# EAGLE board Generador de Funciones (EAGLE 9.0.1)
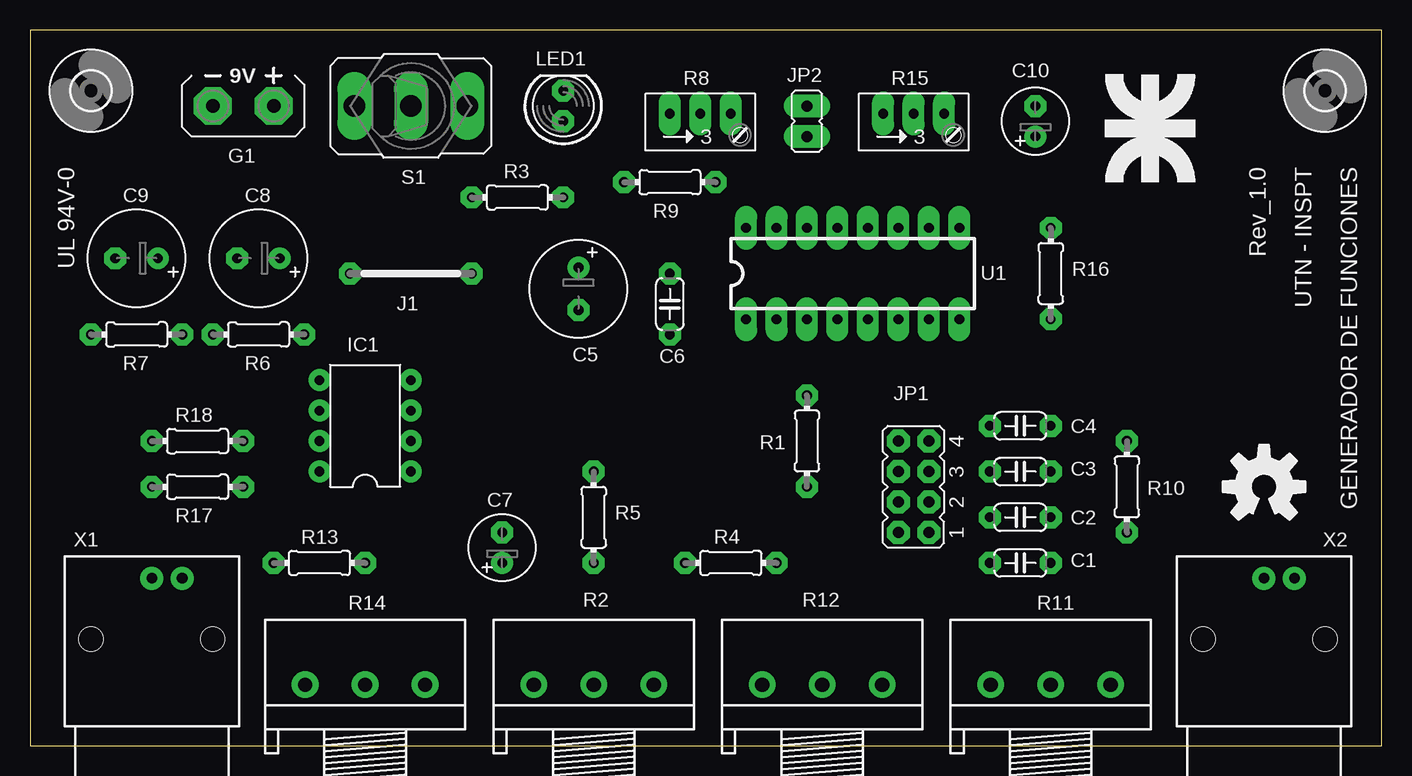
[diagram p0: board, top side]
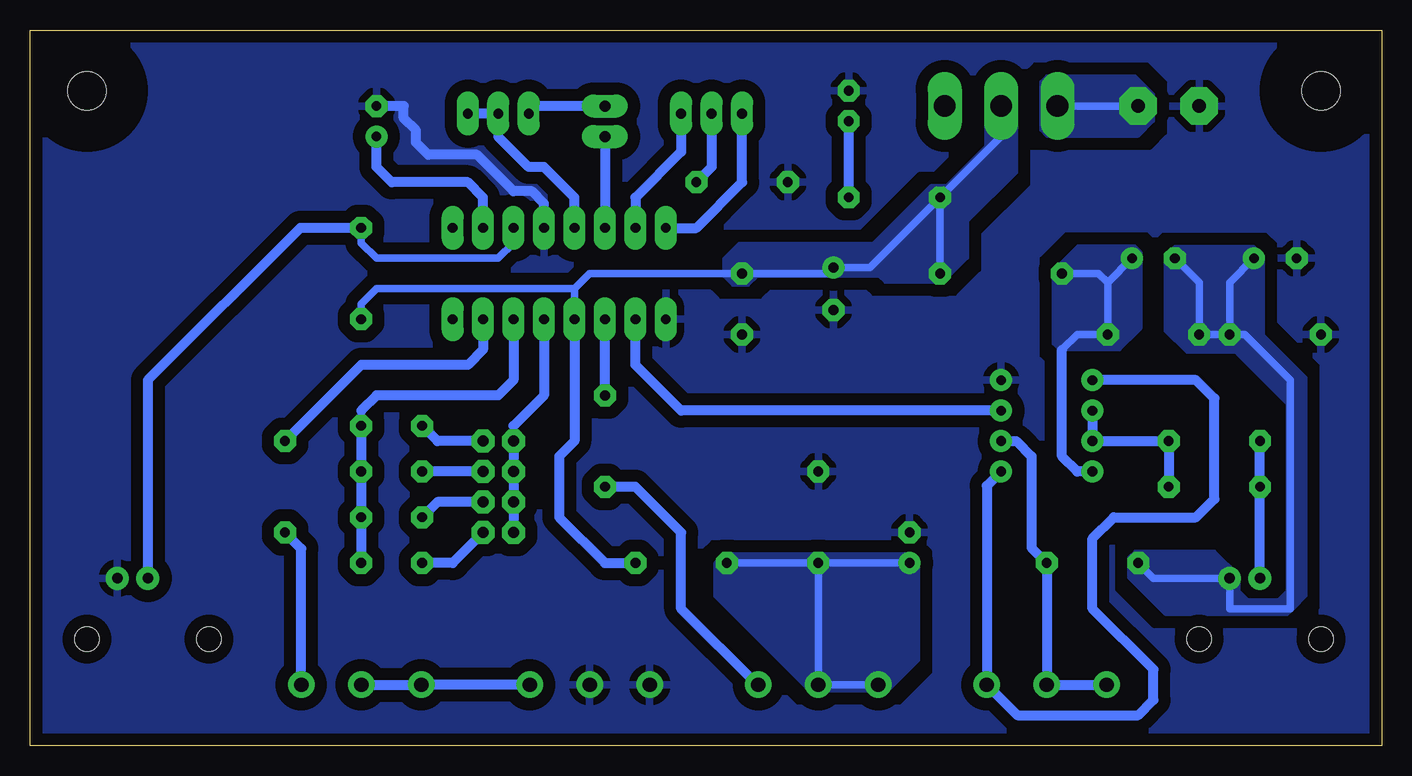
[diagram p1: board, bottom side, seen from below]

Size 112.7 x 59.68 mm. Coordinates in mm from the lower left corner, seen from the top.
Outline: 0,0 112.7,0 112.7,59.68 0,59.68 0,0
Copper layers (1*16): Top 0.035mm / dielectric 1.5mm / Bottom 0.035mm
Design rules "default *": minimum track width 24mil, minimum drill 0.35mm, track to track 6mil, track to pad 6mil, pad to pad 6mil, via to via 6mil, smd to smd 6mil, copper to edge 40mil, drill to drill 24mil, minimum pad ring 20mil, minimum via ring 20mil, stop-mask expansion 4mil, vias tented up to drill 0mil, thermal gap 24mil

## Footprints (pad centres in the part's own frame; a part is rotated, then mirrored left to right if it is on the bottom)
C050-024X044 = drill 0.813 octagon: 1 -2.54,0; 2 2.54,0
E3,5-8 = drill 0.813 pad 1.6: + -1.778,0 | drill 0.813 pad 1.6 octagon: - 1.778,0
E2,5-6 = drill 0.813 pad 1.6: + -1.27,0 | drill 0.813 pad 1.6 octagon: - 1.27,0
AB9V = drill 1.118 pad 3.15 octagon: + 0,2.54; - 0,-2.54
DIL08 = drill 0.813 pad 1.27: 1 -3.81,-3.81; 2 -1.27,-3.81; 3 1.27,-3.81; 4 3.81,-3.81; 5 3.81,3.81; 6 1.27,3.81; 7 -1.27,3.81; 8 -3.81,3.81
10 = drill 0.813 pad 1.6 octagon: 1 -5.08,0; 2 5.08,0
JP4Q = drill 0.914 octagon: 1 -3.81,-1.27; 2 -3.81,1.27; 3 -1.27,-1.27; 4 -1.27,1.27; 5 1.27,-1.27; 6 1.27,1.27; 7 3.81,-1.27; 8 3.81,1.27
JP1 = drill 0.914 long: 1 0,-1.27; 2 0,1.27
LED5MM = drill 0.813 octagon: A -1.27,0; K 1.27,0
0204/7 = drill 0.813 octagon: 1 -3.81,0; 2 3.81,0
3RP/1610N = drill 1.2 pad 2.184: 1 -5,0; 2 0,0; 3 5,0
RJ9W = drill 0.813 long: A 2.54,0.635; E -2.54,0.635; S 0,0.635
M9040P = drill 1.803 long: 1 0,4.699; 2 0,0; 3 0,-4.699
DIL16 = drill 0.813 long: 1 -8.89,-3.81; 2 -6.35,-3.81; 3 -3.81,-3.81; 4 -1.27,-3.81; 5 1.27,-3.81; 6 3.81,-3.81; 7 6.35,-3.81; 8 8.89,-3.81; 9 8.89,3.81; 10 6.35,3.81; 11 3.81,3.81; 12 1.27,3.81; 13 -1.27,3.81; 14 -3.81,3.81; 15 -6.35,3.81; 16 -8.89,3.81
3,2 = hole 3.2: 0,0
AMP_227161 = drill 0.9 pad 1.27: 1 0,-5.08; 2 -2.54,-5.08 | hole 2: -5.08,0; 5.08,0

## Placement (x,y rotation side)
C1  1u  [C050-024X044]  82.55,15.24 0 top
C2  100n  [C050-024X044]  82.55,19.05 0 top
C3  10n  [C050-024X044]  82.55,22.86 0 top
C4  1n  [C050-024X044]  82.55,26.67 0 top
C5  470u  [E3,5-8]  45.72,38.1 270 top
C6  100n  [C050-024X044]  53.34,36.83 270 top
C7  10u  [E2,5-6]  39.37,16.51 90 top
C8  220u  [E3,5-8]  19.05,40.64 180 top
C9  220u  [E3,5-8]  8.89,40.64 180 top
C10  1u  [E2,5-6]  83.82,52.07 90 top
G1  AB9V  [AB9V]  17.78,53.34 270 top
IC1  NE5532N  [DIL08]  27.94,26.67 90 top
J1  J10MM  [10]  31.75,39.37 180 top
JP1  [JP4Q]  73.66,21.59 90 top
JP2  [JP1]  64.77,52.07 180 top
LED1  [LED5MM]  44.45,53.34 90 top
R1  10R  [0204/7]  64.77,25.4 90 top
R2  10k  [3RP/1610N]  46.99,5.08 0 top
R3  1k  [0204/7]  40.64,45.72 0 top
R4  10k  [0204/7]  58.42,15.24 0 top
R5  10k  [0204/7]  46.99,19.05 270 top
R6  1k  [0204/7]  19.05,34.29 180 top
R7  1k  [0204/7]  8.89,34.29 180 top
R8  25k  [RJ9W]  55.88,52.07 0 top
R9  1k  [0204/7]  53.34,46.99 180 top
R10  3k3  [0204/7]  91.44,21.59 90 top
R11  10k  [3RP/1610N]  85.09,5.08 0 top
R12  100k  [3RP/1610N]  66.04,5.08 0 top
R13  10k  [0204/7]  24.13,15.24 0 top
R14  25k  [3RP/1610N]  27.94,5.08 0 top
R15  500R  [RJ9W]  73.66,52.07 0 top
R16  10k  [0204/7]  85.09,39.37 270 top
R17  100  [0204/7]  13.97,21.59 180 top
R18  100  [0204/7]  13.97,25.4 180 top
S1  [M9040P]  31.75,53.34 270 top
U1  XR2206  [DIL16]  68.58,39.37 0 top
U$1  UTN_LOGO_0  [UTN_LOGO_0_TOP]  88.9,46.99 0 top
U$2  [3,2]  5.08,54.61 0 top
U$3  [3,2]  107.95,54.61 0 top
U$4  OSHW-LOGOL  [OSHW-LOGO-L]  102.87,21.59 0 top
X1  1-227161-0  [AMP_227161]  10.16,8.89 180 top
X2  1-227161-0  [AMP_227161]  102.87,8.89 180 top

## Library data of the parts
C1-C10 = rcl; SPICEPREFIX: C
G1 = battery
IC1 = linear
J1 JP1 JP2 = jumper
LED1 = led
R1 R3-R7 R9 R10 R13 R16-R18 = rcl; SPICEPREFIX: R
R2 R8 R11 R12 R14 R15 = pot
S1 = switch
U1 = SparkFun
U$1 = UTN_LOGO
U$2 U$3 = holes
U$4 = SparkFun-Aesthetics
X1 X2 = con-coax; MF: TYCO ELECTRONICS; MPN: 1-227161; OC_FARNELL: unknown; OC_NEWARK: 33B3200

## Nets
A_OUT: IC1.3 U1.2
AGND: C8.- C9.+ R6.2 R7.1 R13.1 X1.2
AMP: R1.2 U1.3
CAP_1: JP1.2 JP1.4 JP1.6 JP1.8 U1.5
CAP_2: C1.2 C2.2 C3.2 C4.2 U1.6
DIST_1: JP2.2 U1.14
DIST_2: R15.A R15.S U1.13
FREQ: R10.2 U1.7
GND: C5.- C6.2 C7.- C9.- C10.- G1.- IC1.4 LED1.K R5.1 R7.2 R9.2 R12.1 R12.2 U1.1 U1.12 X2.2
N$1: IC1.2 R13.2 R14.1 R14.2
N$2: R1.1 R2.3
N$3: R11.1 R11.2 R12.3
N$4: R10.1 R11.3
N$5: C1.1 JP1.1
N$6: C2.1 JP1.3
N$7: C10.+ U1.10
N$8: R8.S R9.1
N$9: C3.1 JP1.5
N$10: C4.1 JP1.7
N$11: R17.2 R18.2 X1.1
N$12: LED1.A R3.2
N$13: JP2.1 R15.E
N$14: G1.+ S1.3
N$15: C7.+ R2.1 R2.2 R4.1 R5.2
N$16: IC1.1 IC1.5 R14.3
N$17: IC1.6 IC1.7 R17.1 R18.1
N$18: C8.+ IC1.8 J1.2 R6.1
SIM_1: R8.E U1.16
SIM_2: R8.A U1.15
SQRT: R16.1 U1.11 X2.1
VCC: C5.+ C6.1 J1.1 R3.1 R4.2 R16.2 S1.2 U1.4

## Tracks (layer width: path | path; a pad name or v marks a point on that pad's centre or on a via)
A_OUT
  Bottom 0.813: U1.2 62.23,31.75 58.42,27.94 IC1.3
AGND
  Bottom 0.61: R13.1 19.05,13.97 X1.2 12.7,11.43 7.62,11.43 7.62,30.48 11.43,34.29 R7.1 | R7.1 R6.2 15.24,38.61 C8.- | C9.+ 12.7,38.61 R7.1
  pour Bottom (no thermals): 9.91,40.64 9.91,34.29 6.35,30.73 6.35,12.45 7.37,11.43 7.87,10.92 12.95,10.92 18.03,10.92 21.08,13.97 21.08,15.75 20.57,16.26 13.97,16.26 11.94,14.22 11.94,12.95 11.18,12.19 8.64,12.19 7.87,12.95 7.87,13.21 7.87,28.45 11.94,32.51 12.19,32.77 16.26,32.77 18.03,34.54 18.03,40.89 17.27,41.66 10.67,41.66 9.91,40.89
AMP
  Bottom 0.813: R1.2 U1.3
CAP_1
  Bottom 0.61: 72.39,26.67 JP1.8
  Bottom 0.813: JP1.8 JP1.6 JP1.4 JP1.2 | U1.5 69.85,29.21 72.39,26.67
CAP_2
  Bottom 0.61: 85.09,27.94 C4.2
  Bottom 0.813: C4.2 C3.2 C2.2 C1.2 | U1.6 72.39,30.48 73.66,29.21 83.82,29.21 85.09,27.94
DIST_1
  Bottom 0.813: JP2.2 U1.14
DIST_2
  Bottom 0.61: 73.66,50.8 R15.S
  Bottom 0.813: U1.13 67.31,45.72 69.85,48.26 71.12,48.26 73.66,50.8 | R15.S R15.A
FREQ
  Bottom 0.813: U1.7 74.93,33.02 76.2,31.75 85.09,31.75 R10.2
GND
  Bottom 0.813: U1.12 69.85,45.21 70.87,46.23 72.39,46.23 75.44,49.28 79.5,49.28 80.52,50.29 80.52,51.31 81.53,52.32 81.53,53.34 C10.-
  pour Bottom (isolate 1.016, rank 6): -5.08,63.5 116.84,63.5 116.84,-5.08 -5.08,-5.08
N$1
  Bottom 0.813: R14.1 R14.2 R13.2 29.21,16.51 29.21,24.13 30.48,25.4 IC1.2
N$2
  Bottom 0.61: 52.07,5.16 R2.3 52.07,5.08
  Bottom 0.813: 52.07,5.08 58.42,11.43 58.42,17.78 62.23,21.59 R1.1
N$3
  Bottom 0.813: R12.3 R11.1 R11.2
N$4
  Bottom 0.61: R11.3 90.17,5.16
  Bottom 0.813: R11.3 90.09,16.43 R10.1
N$5
  Bottom 0.813: JP1.1 77.47,15.24 C1.1
N$6
  Bottom 0.813: JP1.3 78.74,20.32 C2.1
N$7
  Bottom 0.813: U1.10 74.93,45.72 76.2,46.99 82.55,46.99 83.82,48.26 C10.+
N$8
  Bottom 0.813: R8.S 55.88,48.26 R9.1
N$9
  Bottom 0.813: JP1.5 C3.1
N$10
  Bottom 0.813: JP1.7 78.74,25.4 C4.1
N$11
  Bottom 0.813: X1.1 R17.2 R18.2
N$12
  Bottom 0.813: R3.2 LED1.A
N$13
  Bottom 0.813: JP2.1 70.48,53.34 R15.E
N$14
  Bottom 0.61: G1.+ S1.3
  pour Bottom (no thermals): 19.05,52.07 20.32,50.8 27.94,50.8 28.45,51.31 28.45,55.37 27.94,55.88 20.57,55.88 19.05,54.36
N$15
  Bottom 0.61: R2.1 R2.2 R5.2 | R5.2 R4.1 | C7.+ R5.2
  pour Bottom (no thermals): 41.15,4.57 38.61,7.11 38.61,14.73 38.61,15.24 39.37,16 54.86,16 55.63,15.24 55.63,12.45 47.75,4.57 41.4,4.57
N$16
  Bottom 0.813: IC1.1 32.94,21.67 R14.3 30.4,2.54 20.32,2.54 19.05,3.81 19.05,6.35 24.13,11.43 24.13,17.27 22.35,19.05 15.49,19.05 13.97,20.57 13.97,28.96 15.49,30.48 IC1.5
N$17
  Bottom 0.813: R17.1 R18.1 IC1.7 IC1.6
N$18
  Bottom 0.61: C8.+ 22.86,38.61 | 22.86,38.61 R6.1 25.4,34.29 26.67,33.02 | J1.2 23.62,39.37 22.86,38.61
  Bottom 0.813: IC1.8 25.4,22.86 26.67,24.13 26.67,33.02
  pour Bottom (no thermals): 20.07,40.64 20.07,41.15 20.57,41.66 25.4,41.66 27.43,39.62 27.43,33.53 26.92,33.02 21.84,33.02 20.32,34.54 20.07,34.8
SIM_1
  Bottom 0.813: U1.16 57.15,43.18 53.34,46.99 R8.E
SIM_2
  Bottom 0.813: R8.A 58.42,49.53 62.23,45.72 U1.15
SQRT
  Bottom 0.61: U1.11 72.39,41.91 73.66,40.64 83.82,40.64 85.09,41.91 R16.1
  Bottom 0.813: R16.1 90.17,43.18 102.87,30.48 X2.1
VCC
  Bottom 0.61: U1.4 67.31,38.1 | 67.31,38.1 66.04,39.37 C6.1 46.23,39.37 C5.+ 42.67,39.88 R3.1 | R16.2 85.09,36.83 83.82,38.1 67.31,38.1 | S1.2 31.75,50.8 R3.1 | J1.1 R3.1
  Bottom 0.813: R4.2 64.77,15.24 68.58,19.05 68.58,24.13 67.31,25.4 U1.4
  pour Bottom (no thermals): 30.48,53.34 30.48,47.75 34.54,43.69 34.54,40.64 36.58,38.61 41.4,38.61 41.91,39.12 52.07,39.12 52.83,38.35 54.1,38.35 54.86,39.12 54.86,40.64 54.1,41.4 53.59,41.91 42.42,41.91 37.59,46.74 36.32,46.74 33.02,50.04 33.02,52.83 33.02,54.36 32.51,54.86 30.99,54.86 30.48,54.36

## Text on the board
tNames: UL 94V-0 | Rev_1.0 | UTN - INSPT | GENERADOR DE FUNCIONES